# Altium PCB PCB2.PcbDoc
Units mm, origin at the board's own origin, x right, y up, seen from the top; angles counter-clockwise.
Board outline 54.13 x 60.13 mm, 2 copper layers (Top Layer, Bottom Layer); 63 components, 36 nets, 168 pads, 213 vias.
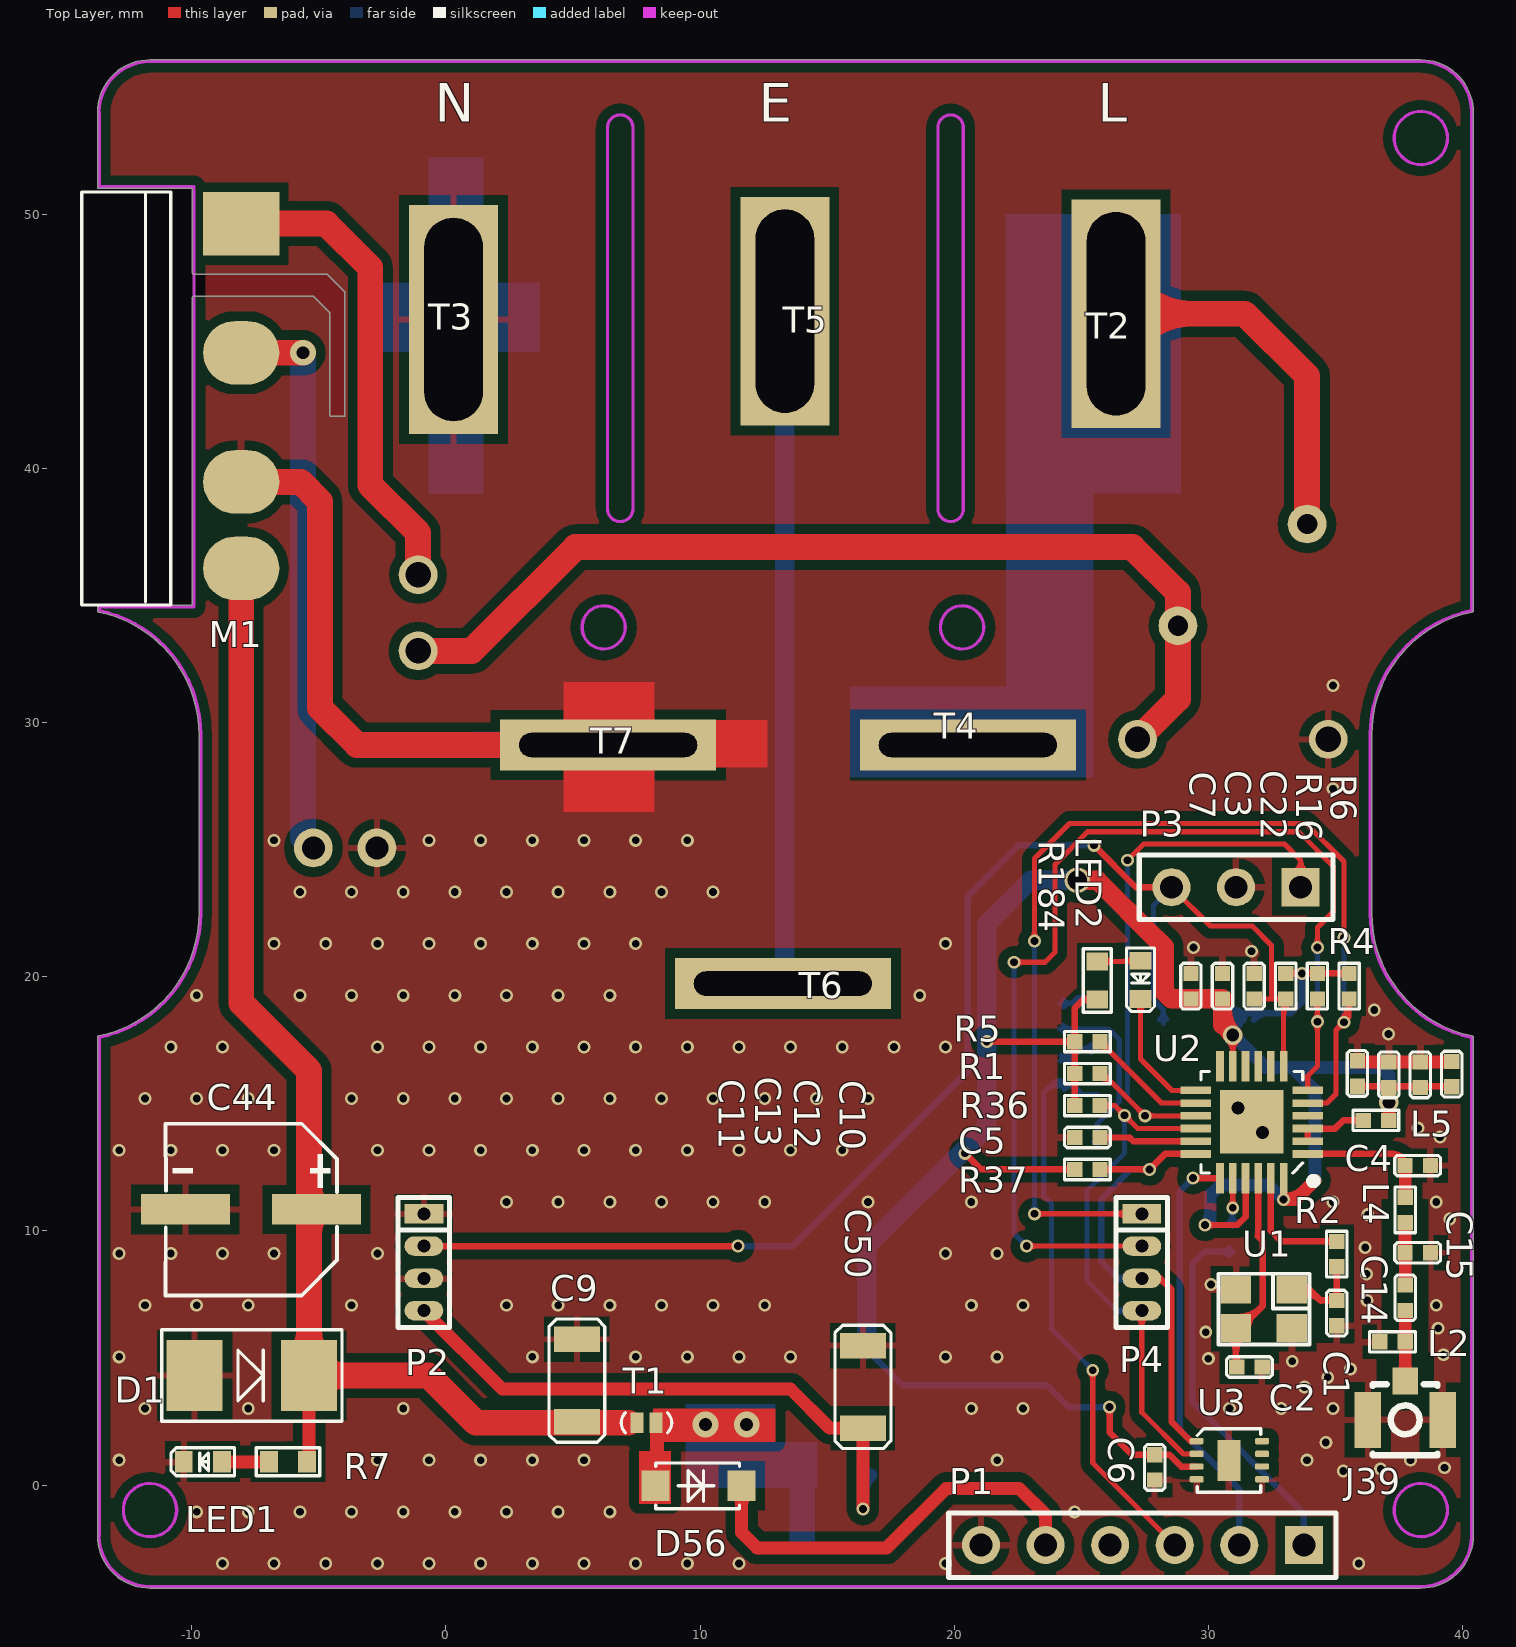
[diagram p0: Top Layer view]
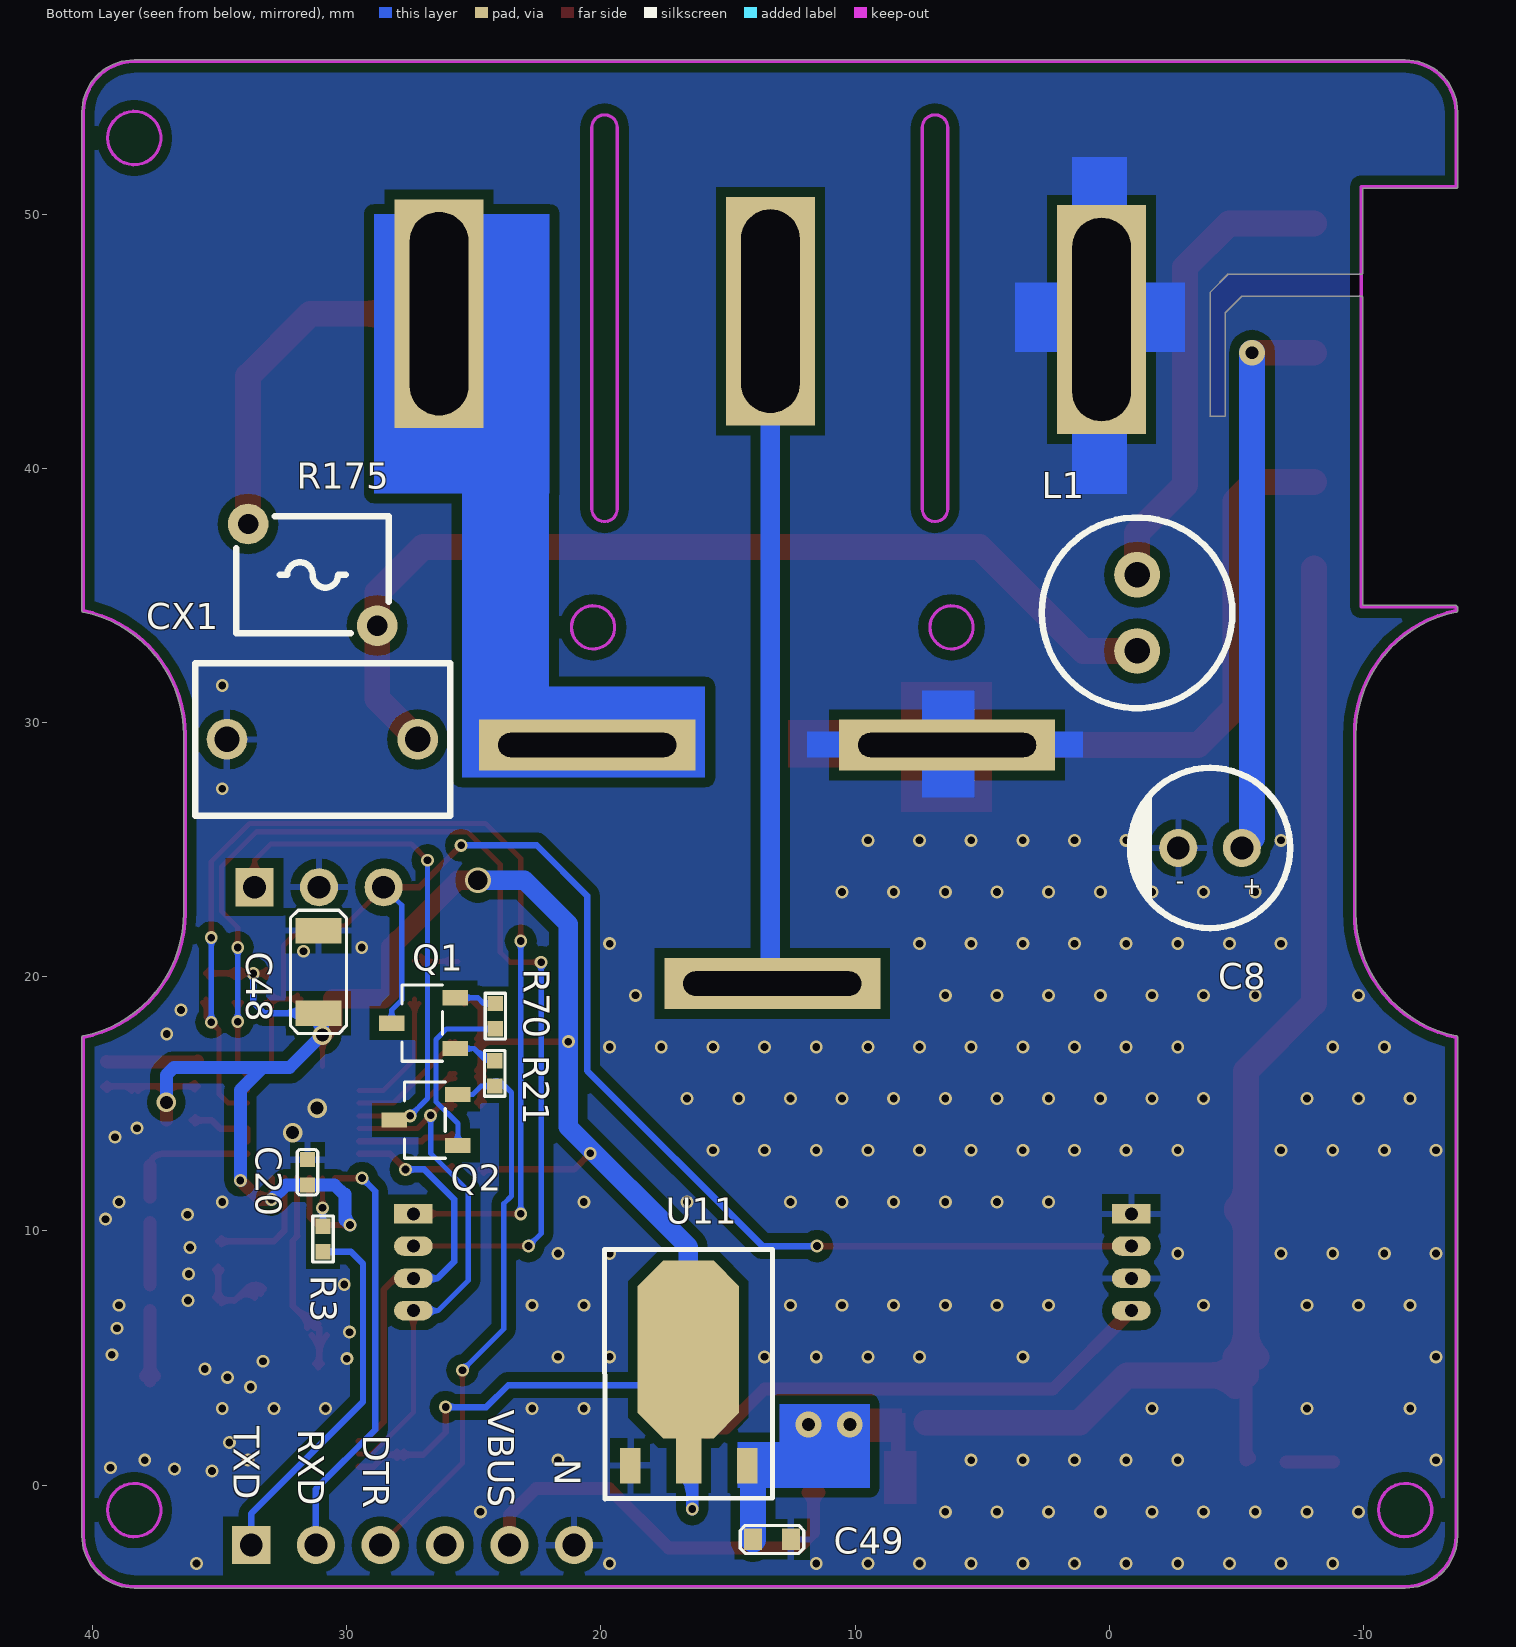
[diagram p1: Bottom Layer view, seen from below]

## Layer stack, top to bottom
Top Layer: signal copper 0.0356
Dielectric: dielectric 0.32, FR-4, Dk 4.8
Bottom Layer: signal copper 0.0356

## Board outline
-13.703,-1.988 -13.703,17.613 cw(c-13.639,17.613) -13.652,17.676 ccw(c-14.639,22.512) -9.703,22.512 -9.703,29.512 ccw(c-14.639,29.512) -13.652,34.348 ccw(c-14.639,29.512) -13.652,34.349 -13.652,34.348 cw(c-13.639,34.411) -13.703,34.411 -13.703,34.527 cw(c-13.639,34.527) -13.667,34.584 cw(c-13.609,34.557) -13.609,34.621 -9.97,34.621 -9.97,46.711 cw(c-9.906,46.711) -9.906,46.774 -5.232,46.774 cw(c-5.232,46.711) -5.187,46.756 -4.578,46.146 cw(c-4.623,46.101) -4.559,46.101 -4.559,42.05 -3.975,42.05 -3.975,46.938 -4.675,47.637 -9.906,47.637 cw(c-9.906,47.701) -9.97,47.701 -9.97,51.016 -13.639,51.016 cw(c-13.639,51.079) -13.703,51.079 -13.703,54.012 cw(c-11.639,54.012) -11.639,56.076 38.361,56.076 cw(c38.361,54.012) 40.424,54.012 40.424,34.411 cw(c40.361,34.411) 40.373,34.348 cw(c41.361,29.512) 40.373,34.349 40.373,34.348 ccw(c41.361,29.512) 36.424,29.512 36.424,22.512 ccw(c41.361,22.512) 40.373,17.676 ccw(c41.361,22.512) 40.373,17.676 cw(c40.361,17.613) 40.424,17.613 40.424,-1.988 cw(c38.361,-1.988) 38.361,-4.052 -11.639,-4.052 cw(c-11.639,-1.988)

## Design rules (kind name [scope] priority, off if disabled: settings)
Clearance RF [InNetClass('rf')] p1: gap=0.635
Clearance AC_L [InNetClass('AC')] p2: gap=5.08
Clearance GND [InPolygon] p3: gap=0.381
Clearance [All] p4: gap=0.127
PolygonConnect [IsVia And InNet(AC_N)] p1: connectstyle=Direct reliefconductorwidth=0.254 reliefentries=4 polygonreliefangle="90 Angle"
PolygonConnect PolygonConnect_1 [All] p2: connectstyle=Relief reliefconductorwidth=0.254 reliefentries=4 polygonreliefangle="90 Angle"
RoutingVias [All] p1: holewidth=0.711 width=1.27 viastyle="Through Hole" minholewidth=0.711 minwidth=1.27 maxholewidth=0.711 maxwidth=1.27
SilkscreenOverComponentPads [IsPad] p1: minsilkscreentomaskgap=0.254
SolderMaskExpansion [All] p1: expansion=0.102
Width [All] p1: maxlimit=7.62 minlimit=0.127 preferedwidth=0.254
27 further rules are at their usual default settings.

## Classes and differential pairs
net class rf: NetC14_1 NetC14_2
component class 01_ESP-CAM: C1 C2 C3 C4 C5 C6 C7 C10 C11 C12 C13 C14 C15 C20 C22 C48 C49 C50 C98 C99 D56 D88 FB5 J39 L2 L4 L5 LED2 M11 P1 P2 P3 P4 P111 P222 Q1 Q2 R1 R2 R3 R4 R5 R6 R16 R21 R36 R37 R70 R184 R707 SW222 U1 U2 U3 U11 U222
component class power: C8 C9 C44 C130 CX1 D1 D10 L1 LED1 M1 P7 R7 R173 R175 R176 R177 T1 T2 T3 T4 T5 T6 T7

## Components (designator, comment, footprint, x,y, rotation, side; value= is the part's Value field where it differs from the comment)
C1 "CAP NP_Dup1" 0402C 35.052,7.27 r270 top
C2 "CAP NP_Dup1" 0402C 31.115,4.648 r0 top
C3 "CAP NP_Dup1" 0402C 30.557,19.131 r90 top
C4 "CAP NP_Dup1" 0402C 38.735,12.573 r180 top
C5 "CAP NP_Dup1" 0402C 25.74,13.678 r180 top
C6 "CAP NP_Dup1" 0402C 27.89,1.199 r270 top
C7 "CAP NP_Dup1" 0402C 29.312,19.131 r90 top
C8 "MHT10UF400V87EC0217" CAP-TH_BD6.3-P2.50-D0.5-FD -3.962,25.07 r0 bottom
C9 "1uF/50V" 1206C 5.156,5.74 r270 top
C10 "CAP NP_Dup1" 0402C 39.573,15.672 r90 top
C11 "CAP NP_Dup1" 0402C 35.865,15.697 r90 top
C12 "CAP NP_Dup1" 0402C 38.337,15.646 r90 top
C13 "CAP NP_Dup1" 0402C 37.101,15.646 r90 top
C14 "CAP NP_Dup1" 0402C 37.744,7.874 r270 top
C15 "CAP NP_Dup1" 0402C 38.735,9.144 r180 top
C20 "CAP NP_Dup1" 0402C 31.547,11.811 r90 bottom
C22 "CAP NP_Dup1" 0402C 31.801,19.131 r90 top
C44 "RX220UF16V90RV0106" CAP-SMD_BD6.3-L6.6-W6.6-FD-2 -7.671,10.846 r180 top
C48 "CAP NP_Dup1" 1206C 31.115,18.567 r90 bottom
C49 "CAP NP" 0603C 14.021,-2.134 r180 bottom
C50 "CAP NP" 1206C 16.409,2.24 r90 top
CX1 "MPX334K31B9KN20600" CAP-TH_L10.0-W6.0-P7.50-D0.6 30.963,29.342 r180 bottom
D1 "SMBJ12CA" SMB -9.881,4.318 r0 top
D56 "LL4148" sod123 8.255,-0.025 r0 top
J39 "IPEX_0" IPEX-SMD_BWIPX-1-001E 37.745,3.333 r270 top
L1 "1.2mH/0.3A" IND-TH_BD7.5-P3.00-D0.6 -1.092,34.321 r90 bottom
L2 "CHOKE" 0402R 37.744,5.639 r180 top
L4 "CHOKE" 0402R 37.744,11.328 r270 top
L5 "CHOKE" 0402R 36.093,14.351 r0 top
LED1 "5V" 0603LED -8.811,0.92 r180 top
LED2 "5V" 0603LED 27.331,20.631 r270 top
M1 "LS03-K3B12SS" LS03-K3B12SS -10.82,49.632 r270 top
P1 "Header 6" HDR1X6 33.757,-2.357 r180 top
P2 "Header 4" 1.27-4P -0.864,10.676 r270 top locked
P3 "Header 3" HDR1X3 33.63,23.526 r180 top
P4 "Header 4" 1.27-4P 27.381,10.676 r270 top locked
Q1 "NPN BCE_2" SOT23-3 25.731,17.176 r180 bottom
Q2 "NPN BCE_2" SOT23-3 25.629,13.366 r180 bottom
R1 "RESISTOR_0" 0402R 25.74,16.192 r180 top
R2 "RESISTOR" 0402R 35.052,8.59 r90 top
R3 "RESISTOR" 0402R 30.937,10.185 r270 bottom
R4 "RESISTOR_0" 0402R 35.535,19.131 r90 top
R5 "RESISTOR_0" 0402R 25.74,17.45 r180 top
R6 "RESISTOR_0" 0402R 34.29,19.131 r90 top
R7 "1K" 0603R -6.957,0.92 r0 top
R16 "RESISTOR_0" 0402R 33.046,20.131 r270 top
R21 "RESISTOR_0" 0402R 24.181,15.702 r90 bottom
R36 "RESISTOR_0" 0402R 25.74,14.935 r180 top
R37 "RESISTOR_0" 0402R 25.74,12.421 r180 top
R70 "RESISTOR_0" 0402R 24.156,18.954 r270 bottom
R175 "FTR250-030" FUSE-TH_L6.0-W4.6-P5.10-D0.6-S4.00 31.344,35.814 r0 bottom
R184 "1K" 0603R 25.629,20.606 r270 top
T1 "TEST_P" TEST_P 7.518,2.456 r0 top
T2 "TP" 220V_HOLE 26.367,46.087 r90 top locked
T3 "TP" 220V_HOLE 0.307,45.859 r90 top locked
T4 "TP" 220V_HOLE2#1 20.541,28.88 r180 top locked
T5 "TP" 220V_HOLE 13.337,46.189 r90 top locked
T6 "TP" 220V_HOLE2#2 13.261,19.735 r180 top locked
T7 "TP" 220V_HOLE2#1 6.384,28.88 r180 top locked
U1 "X1_1" XTAL4TN_3225 32.182,6.939 r180 top
U2 "ESP8684H4" QFN24-MPU6000 33.909,13.03 r180 top
U3 "SHT40" SH30 30.811,0.97 r0 top
U11 "TLV1117" SOT223 18.847,0.767 r180 bottom

## Footprints (in the part's own frame and the unit in brackets; to place one, negate y for a bottom-side part, rotate by r counter-clockwise, add the part's x,y. Pads: shape width x height; smd on the part's side, far side on the other; paste and mask are expansions set on the pad)
1.27-4P [mil]
  rect 30x60 hole 20: 1(0,0)
  oval 30x60 hole 20: 2(50,0) 3(100,0) 4(150,0)
  silkscreen extent -25,-40 176,40
220V_HOLE [mm]
  rect 9x3.5 hole 2.3 slot 8 at 0 deg: 1(0,0)
220V_HOLE2#1 [mm]
  rect 8.5x2 hole 0.95 slot 7 at 0 deg: 1(0,-0.24)
220V_HOLE2#2 [mm]
  rect 8.5x2 hole 0.95 slot 7 at 0 deg: 1(0,0)
0402C [mm]
  rect 0.6x0.6 smd: 1(0,0) 2(1,0)
  silkscreen extent -0.4,-0.4 1.4,0.4
0402R [mm]
  rect 0.6x0.6 smd: 1(0,0) 2(1,0)
  silkscreen extent -0.4,-0.4 1.4,0.4
0603C [mm]
  rect 0.7x0.85 smd: 1(0,0) 2(1.5,0)
  silkscreen extent -0.5,-0.55 2,0.55
0603LED [mm]
  rect 0.7x0.85 smd: 1(0,0) 2(1.5,0)
  silkscreen extent -0.5,-0.55 2,0.55
0603R [mm]
  rect 0.7x0.85 smd: 1(0,0) 2(1.5,0)
  silkscreen extent -0.5,-0.55 2,0.55
1206C [mm]
  rect 1x1.8 smd: 1(0,0) 2(3.25,0)
  silkscreen extent -0.8,-1.1 4.05,1.1
CAP-SMD_BD6.3-L6.6-W6.6-FD-2 [mm]
  rect 3.5x1.2 smd: 1(-2.58,0) 2(2.58,0)
  silkscreen extent -3.4,-3.38 3.36,3.38
CAP-TH_BD6.3-P2.50-D0.5-FD [mil]
  round 59.05 / inner round 60 / far side round 60 hole 35.43 paste-99999 mask+1.97: 1(-49.21,0) 2(49.21,0)
  silkscreen extent -124,-124 127,124
CAP-TH_L10.0-W6.0-P7.50-D0.6 [mil]
  round 62.99 / inner round 60 / far side round 60 hole 39.37: 1(-147.64,0) 2(147.64,0)
  silkscreen extent -197,-118 198,118
FUSE-TH_L6.0-W4.6-P5.10-D0.6-S4.00 [mm]
  round 1.6 / inner round 1.524 / far side round 1.524 hole 0.8: 1(-2.54,2) 2(2.54,-2)
  silkscreen extent -3,-2.3 3,2.3
HDR1X3 [mm] "Connector; Header; 3 Position"
  rect 1.5x1.5 hole 0.9: 1(0,0)
  round 1.5 hole 0.9: 2(2.54,0) 3(5.08,0)
  silkscreen extent -1.27,-1.27 6.35,1.27
HDR1X6 [mm] "Connector; Header; 6 Position"
  rect 1.5x1.5 hole 0.9: 1(0,0)
  round 1.5 hole 0.9: 2(2.54,0) 3(5.08,0) 4(7.62,0) 5(10.16,0) 6(12.7,0)
  silkscreen extent -1.27,-1.27 13.97,1.27
IND-TH_BD7.5-P3.00-D0.6 [mm]
  round 1.8 / inner round 1.524 / far side round 1.524 hole 1: 1(-1.5,0) 2(1.5,0)
  silkscreen extent -3.75,-3.75 3.75,3.75
IPEX-SMD_BWIPX-1-001E [mm]
  rect 1.05x1 smd: 1(-0.763,0)
  rect 2.2x1.05 smd: 2(0.763,-1.475) 3(0.763,1.475)
  silkscreen extent -0.64,-1.27 2.16,1.27
LS03-K3B12SS [mm]
  rect 2.5x3 smd: 1(0,2.769)
  oval 2.5x3 smd: 2(5.08,2.769) 3(10.16,2.769) 4(13.564,2.769)
  silkscreen extent -1.24,-3.5 15,0
QFN24-MPU6000 [mm]
  rect 1.2x0.3 smd: 1(0,0) 2(0,-0.5) 3(0,-1) 4(0,-1.5) 5(0,-2) 6(0,-2.5) 13(4.4,-2.5) 14(4.4,-2) 15(4.4,-1.5) 16(4.4,-1) 17(4.4,-0.5) 18(4.4,0)
  rect 0.3x1.2 smd: 7(0.95,-3.45) 8(1.45,-3.45) 9(1.95,-3.45) 10(2.45,-3.45) 11(2.95,-3.45) 12(3.45,-3.45) 19(3.45,0.95) 20(2.95,0.95) 21(2.45,0.95) 22(1.95,0.95) 23(1.45,0.95) 24(0.95,0.95)
  rect 2.5x2.5 smd: 25(2.21,-1.27)
  silkscreen extent -0.31,-3.25 4.2,1.16
SH30 [mm]
  rrect50% 0.55x0.25 smd: 1(-1.275,0.762) 2(-1.275,0.262) 3(-1.275,-0.238) 4(-1.275,-0.738) 5(1.3,-0.738) 6(1.3,-0.238) 7(1.3,0.262) 8(1.3,0.762)
  rect 0.9x1.6 smd: 9(0,0)
  silkscreen extent -1.25,-1.25 1.25,1.25
SMB [mm]
  rect 2.2x2.8 smd: 1(0,0) 2(4.5,0)
  silkscreen extent -1.3,-1.8 5.8,1.8
sod123 [mm]
  rect 1.1x1.2 smd: 1(0,0) 2(3.385,0)
  silkscreen extent 0,-0.9 3.3,0.9
SOT23-3 [mm]
  rect 1x0.6 smd: 1(0,0) 2(0,2) 3(-2.5,1)
  silkscreen extent -2.1,-0.5 -0.5,2.5
SOT223 [mm]
  rect 0.8x1.4 smd: 1(0,0) 3(4.6,0)
  rect 1x1.854 smd: 2(2.3,0.227)
  oct 4x7 smd: 4(2.286,4.572)
  silkscreen extent -1.02,-1.3 5.59,8.51
TEST_P [mm]
  rect 0.5x0.8 smd: 1(0,0) 2(0.75,0)
  silkscreen extent -0.62,-0.4 1.37,0.4
XTAL4TN_3225 [mm]
  rect 1.2x1.1 smd: 1(-1.1,-0.75) 2(1.1,-0.75) 3(1.1,0.75) 4(-1.1,0.75)
  silkscreen extent -1.8,-1.38 1.79,1.4

## Part data
C8 C44: library part "Cap Pol1", "Polarized Capacitor (Radial)"
C9 CX1: library part Cap, "Capacitor"
D1: library part 1N5819HW-7-F, "1.0 A Surface Mount Schottky Barrier Rectifier, 40 V, -65 to 125 degC, 2-Pin SOD-123 Package, RoHS, Tape and Reel"
D56: "VISHAY,LL4148,圆柱体MiniMELF100V/2A,ROHS"
L1: library part 1276AS-H-100M=P2, "Metal alloy Power Inductor, 10 uH, ±20%, 1210 (3225)"
LED1 LED2: library part LED
P1: "Header, 6-Pin"
P2 P4: "Header, 4-Pin"
P3: "Header, 3-Pin"
R7 R184: library part R, "R"
R175: library part "Res Varistor", "Varistor (Voltage-Sensitive Resistor)"
U11: library part TLV1117-33IDCY

## Via types
v1: diameter 0.508, hole 0.305, Top Layer to Bottom Layer, tented both sides, 205 vias
v2: diameter 0.762, hole 0.508, Top Layer to Bottom Layer, tented both sides, 4 vias
v3: diameter 1.016, hole 0.508, Top Layer to Bottom Layer, tented both sides, 3 vias
v4: diameter 1.016, hole 0.762, Top Layer to Bottom Layer, tented both sides, 1 vias

## Nets (pads, with @x,y where several pads share a name; then routed paths per layer and width w, separated by ;. In a path a pad name is that pad's centre, name@x,y a point inside that pad or via, vN(x,y) a via of type N, cw(c..) or ccw(c..) an arc to the next point about the centre after c; other vN are vias at no path point)
AC_L: L1.2 M1.1 | length 18.7
  Top Layer w1.016: M1.1 -6.477,49.632 -4.699,49.632 -2.972,47.904 -2.972,39.345 -1.092,37.465 L1.2
AC_N: C1.2 C2.2 C3.2 C4.1 C5.2 C6.2 C7.2 C8.2 C9.1 C10.2 C11.2 C12.2 C13.2 C15.1 C20.2 C22.2 C44.2 C48.2 C49.2 C50.2 CX1.1 D1.1 J39.2 J39.3 L2.2 LED1.2 M1.3 P1.6 P2.1 P2.3 P3.2 T3.1 T7.1 U1.2 U1.4 U2.25 U3.4 U3.5 U3.9 U11.1 | length 27.5
  Top Layer w0.508: C11.2@35.865,16.688 35.906,16.646 C13.2 C12.2 39.43,16.646 C10.2@39.446,16.662
  Top Layer w1.016: M1.3 -5.715,39.472 -4.953,38.71 -4.953,33.325 -4.953,30.582 -3.491,29.12 T7.1 T7.1@6.065,29.439
  other v1: -8.788,-3.08 -6.756,-3.08 -4.724,-3.08 -2.692,-3.08 -0.66,-3.08 1.372,-3.08 3.404,-3.08 5.436,-3.08 7.468,-3.08 9.5,-3.08 11.532,-3.08 19.66,-3.08 35.916,-3.08 -9.804,-1.048 -7.772,-1.048 -5.74,-1.048 -3.708,-1.048 -1.676,-1.048 0.356,-1.048 2.388,-1.048 4.42,-1.048 6.452,-1.048 24.74,-1.048 35.306,0.559 36.779,0.635 39.294,0.686 -12.852,0.984 -2.692,0.984 -0.66,0.984 1.372,0.984 3.404,0.984 5.436,0.984 21.692,0.984 33.884,0.984 37.948,0.984 34.62,1.676 -11.836,3.016 -7.772,3.016 -1.676,3.016 20.676,3.016 22.708,3.016 30.836,3.016 32.868,3.016 34.9,3.016 33.782,3.861 34.696,4.242 35.585,4.572 33.299,4.877 29.997,4.978 -12.852,5.048 3.404,5.048 7.468,5.048 9.5,5.048 11.532,5.048 13.564,5.048 19.66,5.048 21.692,5.048 39.243,5.131 29.896,6.02 39.04,6.172 -11.836,7.08 -9.804,7.08 -7.772,7.08 -3.708,7.08 2.388,7.08 4.42,7.08 6.452,7.08 8.484,7.08 10.516,7.08 12.548,7.08 20.676,7.08 22.708,7.08 38.964,7.08 36.246,7.264 30.101,7.894 36.22,8.306 -12.852,9.112 -10.82,9.112 -8.788,9.112 -6.756,9.112 -2.692,9.112 19.66,9.112 21.692,9.112 36.17,9.347 39.497,10.465 36.271,10.643 2.388,11.144 4.42,11.144 6.452,11.144 8.484,11.144 10.516,11.144 12.548,11.144 16.612,11.144 20.676,11.144 34.9,11.144 38.964,11.144 -12.852,13.176 -10.82,13.176 -8.788,13.176 -6.756,13.176 -2.692,13.176 -0.66,13.176 1.372,13.176 3.404,13.176 5.436,13.176 7.468,13.176 9.5,13.176 11.532,13.176 13.564,13.176 15.596,13.176 39.116,13.691 38.252,14.046 -11.836,15.208 -9.804,15.208 -7.772,15.208 -3.708,15.208 -1.676,15.208 0.356,15.208 2.388,15.208 4.42,15.208 6.452,15.208 8.484,15.208 10.516,15.208 12.548,15.208 14.58,15.208 16.612,15.208 -10.82,17.24 -8.788,17.24 -2.692,17.24 -0.66,17.24 1.372,17.24 3.404,17.24 5.436,17.24 7.468,17.24 9.5,17.24 11.532,17.24 13.564,17.24 15.596,17.24 17.628,17.24 19.66,17.24 37.084,17.755 36.525,18.694 -9.804,19.272 -5.74,19.272 -3.708,19.272 -1.676,19.272 0.356,19.272 2.388,19.272 4.42,19.272 6.452,19.272 18.644,19.272 31.699,21.006 29.413,21.158 -6.756,21.304 -4.724,21.304 -2.692,21.304 -0.66,21.304 1.372,21.304 3.404,21.304 5.436,21.304 7.468,21.304 19.66,21.304 -5.74,23.336 -3.708,23.336 -1.676,23.336 0.356,23.336 2.388,23.336 4.42,23.336 6.452,23.336 8.484,23.336 10.516,23.336 -6.756,25.368 -0.66,25.368 1.372,25.368 3.404,25.368 5.436,25.368 7.468,25.368 9.5,25.368 34.9,27.4 34.9,31.464
  other v2: 32.131,13.868 31.166,14.834
DTR: P1.3 Q2.2 R21.1 | length 25.2
  Top Layer w0.203: v1@25.343,4.413 cw(c25.083,4.153) 25.451,4.153 cw(c25.819,4.153) v1@25.559,4.413 ; v1(25.451,4.521) 25.451,1.575 25.451,0.869 27.72,-1.4 P1.3
  Bottom Layer w0.203: 23.598,15.521 cw(c24.071,15.048) R21.1@24.182,15.707 ; 23.876,15.799 cw(c24.151,15.525) R21.1@24.216,15.908 ; R21.1@24.321,15.562 cw(c24.66,15.223) 24.66,15.702 cw(c24.66,16.181) R21.1@24.321,15.843 ; v1@25.298,4.521 ccw(c24.93,4.521) 25.191,4.781 ccw(c25.451,5.042) v1@25.451,4.674 ; v1(25.451,4.521) 23.825,6.147 23.825,11.074 23.52,11.379 23.52,15.443 23.78,15.702 R21.1 24.709,15.702 25.046,15.366 Q2.2
EARTH: T5.1 T6.1 | length 26.5
  Bottom Layer w0.762: T6.1 13.337,19.811 T5.1
EN: C22.1 P2.2 P3.3 Q1.3 R16.2 U2.7 | length 61.2
  Top Layer w0.203: P3.3 30.079,21.996 31.725,21.996 32.487,21.234 32.487,19.131 ; C22.1 32.487,19.131 ; C22.1@31.941,18.991 cw(c32.28,18.652) 32.28,19.131 cw(c32.28,19.61) C22.1@31.941,19.272 ; R16.2@32.905,18.991 ccw(c32.567,18.652) 32.567,19.131 ccw(c32.567,19.61) R16.2@32.905,19.272 ; U2.7 32.959,19.045 R16.2 32.487,19.131 ; 32.959,18.443 cw(c33.734,18.443) R16.2@33.186,18.991
  Top Layer w0.254: P2.2 v1(11.498,9.406) ; v1@11.408,9.316 ccw(c11.191,9.1) 11.191,9.406 ccw(c11.191,9.713) v1@11.408,9.496 ; v1(25.502,25.171) 27.147,23.526 P3.3
  Bottom Layer w0.203: Q1.3@28.09,18.316 ccw(c27.752,18.655) 28.231,18.655 ccw(c28.71,18.655) Q1.3@28.371,18.316 ; Q1.3 28.231,18.694 27.838,19.087 27.838,22.814 P3.3
  Bottom Layer w0.254: v1(11.498,9.406) 13.648,9.406 20.541,16.299 20.541,23.182 22.53,25.171 v1(25.502,25.171) ; v1@11.588,9.316 cw(c11.805,9.1) 11.805,9.406 cw(c11.805,9.713) v1@11.588,9.496
ESP_VDD33: C3.1 C6.1 C7.1 C10.1 C11.1 C12.1 C13.1 C20.1 C48.1 C50.1 L5.2 P2.4 R1.2 R4.2 R5.2 R6.2 R16.1 R36.2 R37.2 R184.2 U2.11 U2.21 U2.24 U3.3 U11.2 U11.4 | length 146
  Top Layer w0.203: v2@30.761,17.506 cw(c30.284,17.029) 30.959,17.029 cw(c31.634,17.029) v2@31.157,17.506 ; U2.11 v2(30.959,17.704)
  Top Layer w0.254: v1@20.422,12.929 cw(c20.422,12.622) 20.638,12.839 cw(c20.855,13.056) v1@20.549,13.056 ; v1(20.422,13.056) 21.057,12.421 R37.2 ; v1(21.285,17.45) R5.2 ; v1@21.375,17.36 cw(c21.592,17.143) 21.592,17.45 cw(c21.592,17.756) v1@21.375,17.54 ; R37.2@24.617,12.298 ccw(c24.322,12.003) 24.322,12.421 ccw(c24.322,12.838) R37.2@24.617,12.543 ; R36.2@24.617,15.058 ccw(c24.322,15.353) 24.74,15.353 ccw(c25.157,15.353) R36.2@24.862,15.058 ; R1.2@24.617,16.07 cw(c24.322,15.775) 24.74,15.775 cw(c25.157,15.775) R1.2@24.862,16.07 ; R1.2@24.617,16.315 ccw(c24.322,16.61) 24.74,16.61 ccw(c25.157,16.61) R1.2@24.862,16.315 ; R36.2 R1.2 R5.2 ; R5.2@24.862,17.327 ccw(c25.157,17.032) 24.74,17.032 ccw(c24.322,17.032) 24.617,17.327 ccw(c24.322,17.032) 24.322,17.45 ccw(c24.322,17.867) 24.617,17.572 ccw(c24.322,17.867) 24.74,17.867 ccw(c25.157,17.867) R5.2@24.862,17.572 ; R184.2@25.383,18.963 ccw(c25.075,18.703) 25.075,19.106 ; R184.2@25.383,19.25 cw(c25.075,19.509) 25.075,19.106 ; R184.2 25.075,19.106 ; v1@26.021,2.984 cw(c25.805,2.767) 26.111,2.767 cw(c26.418,2.767) v1@26.201,2.984 ; v1(26.111,3.073) 26.111,2.083 26.995,1.199 C6.1 28.468,1.199 28.935,0.732 U3.3 ; C6.1@27.767,1.077 ccw(c27.472,0.781) 27.472,1.199 ccw(c27.472,1.617) C6.1@27.767,1.321 ; C6.1@28.012,1.077 cw(c28.307,0.781) 28.307,1.199 cw(c28.307,1.617) C6.1@28.012,1.321 ; v1(29.87,10.236) 31.14,10.236 31.467,10.563 31.467,12.072 U2.21 ; v1@29.96,10.146 cw(c30.177,9.93) 30.177,10.236 cw(c30.177,10.543) v1@29.96,10.326 ; v1@32.869,11.327 ccw(c32.652,11.544) 32.959,11.544 ccw(c33.266,11.544) v1@33.049,11.327 ; v1(32.959,11.237) U2.24 ; R16.1 v1(33.68,20.131) R6.2 R4.2 ; R16.1@33.168,20.009 cw(c33.463,19.714) 33.463,20.131 cw(c33.463,20.549) R16.1@33.168,20.254 ; v1@33.591,20.042 ccw(c33.374,19.825) 33.374,20.131 ccw(c33.374,20.438) v1@33.591,20.221 ; v1@33.77,20.042 cw(c33.987,19.825) 33.987,20.131 cw(c33.987,20.438) v1@33.77,20.221 ; R6.2@34.168,20.009 ccw(c33.873,19.714) 33.873,20.131 ccw(c33.873,20.549) R6.2@34.168,20.254 ; R6.2@34.413,20.009 cw(c34.708,19.714) 34.708,20.131 cw(c34.708,20.549) R6.2@34.413,20.254 ; R4.2@35.413,20.009 ccw(c35.117,19.714) 35.117,20.131 ccw(c35.117,20.549) R4.2@35.413,20.254 ; C11.1 38.337,15.697 39.548,15.697 C10.1 ; C11.1@35.987,15.575 cw(c36.282,15.28) 36.282,15.697 cw(c36.282,16.115) C11.1@35.987,15.82 ; 36.561,15.697 cw(c36.561,15.106) C13.1@36.979,15.524 ; L5.2 L5.2@37.101,14.359 ; C13.1@37.223,15.524 cw(c37.641,15.106) 37.641,15.697 ; 37.797,15.697 cw(c37.797,15.106) C12.1@38.215,15.524 ; C12.1@38.459,15.524 cw(c38.877,15.106) 38.877,15.697 ; 39.094,15.697 cw(c39.094,15.193) C10.1@39.451,15.549 ; 39.217,15.697 ccw(c39.217,16.028) C10.1@39.451,15.794 ; R5.2 24.74,18.771 25.075,19.106
  Top Layer w0.508: P2.4 2.218,3.785 13.564,3.785 15.108,2.24 C50.1 v1(16.409,-0.939) ; C50.1@15.835,2.066 ccw(c15.415,1.647) 15.415,2.24 ccw(c15.415,2.834) C50.1@15.835,2.414 ; C50.1@16.235,2.066 cw(c15.815,1.647) 16.409,1.647 cw(c17.003,1.647) C50.1@16.583,2.066 ; 33.774,11.575 cw(c32.959,12.39) v1(32.959,11.237) 33.437,11.237 v1(34.188,11.989) ; L5.2@37.101,14.359 v2(37.101,15.062)
  Top Layer w0.762: v4(24.841,23.8) 25.629,23.8 27.939,21.489 ; 27.966,21.489 28.27,21.185 28.27,19.406 28.544,19.131 C7.1 C3.1 30.557,18.106 ; 30.557,18.675 ccw(c31.931,18.675) v2(30.959,17.704)
  Bottom Layer w0.254: U11.4 17.963,3.937 23.647,3.937 24.511,3.073 v1(26.111,3.073) ; v1@26.021,2.984 ccw(c25.805,2.767) 25.805,3.073 ccw(c25.805,3.38) v1@26.021,3.163 ; C48.1 33.249,18.567 33.68,18.999 v1(33.68,20.131) ; C48.1@31.779,18.304 cw(c32.415,17.667) 32.415,18.567 cw(c32.415,19.468) C48.1@31.779,18.831 ; v1@33.591,20.042 cw(c33.374,19.825) 33.68,19.825 cw(c33.987,19.825) v1@33.77,20.042
  Bottom Layer w0.508: v1(16.409,-0.939) U11.2@16.409,0.856 ; 16.409,-0.361 cw(c17.475,-0.361) U11.2@16.721,0.393 ; 30.074,10.727 cw(c29.38,10.727) v1(29.87,10.236) 30.074,10.439 30.074,11.455 ; 30.124,11.455 30.48,11.811 C20.1 32.385,11.811 v1(32.959,11.237) ; v2@30.959,17.69 cw(c31.872,17.69) C48.1@31.276,18.381 ; v2(30.959,17.704) 30.959,18.411 C48.1 ; v2@31.115,17.577 32.258,16.434 33.299,16.434 ; v1(34.188,11.989) 34.188,15.545 33.299,16.434 ; v2(37.101,15.062) 37.101,16.137 36.805,16.434 33.299,16.434
  Bottom Layer w0.762: U11.4 16.561,9.373 21.285,14.097 v1(21.285,17.45) 21.285,22.073 23.012,23.8 v4(24.841,23.8)
I2C_SCL: P4.4 R36.1 U2.16 U3.2 | length 25.1
  Top Layer w0.203: R36.1 26.314,14.935 v1(26.701,14.549) 27.219,14.03 U2.16 ; R36.1@25.88,14.795 cw(c26.219,14.456) 26.219,14.935 cw(c26.219,15.414) R36.1@25.88,15.075 ; v1@26.548,14.549 ccw(c26.18,14.549) 26.44,14.809 ccw(c26.701,15.069) v1@26.701,14.701 ; v1@26.701,14.397 cw(c26.701,14.029) 26.961,14.289 cw(c27.221,14.549) v1@26.853,14.549 ; P4.4@27.184,6.669 cw(c26.707,6.192) 27.381,6.192 cw(c28.056,6.192) P4.4@27.579,6.669 ; P4.4 27.381,2.87 29.019,1.232 U3.2
  Bottom Layer w0.203: v1@26.593,14.441 cw(c26.333,14.181) 26.701,14.181 cw(c27.068,14.181) v1@26.808,14.441 ; v1(26.701,14.549) 26.701,13.061 25.222,11.582 25.222,8.052 26.408,6.866 ; P4.4@26.785,6.688 ccw(c26.408,6.378) 26.408,6.866 ; P4.4@26.785,7.044 cw(c26.408,7.354) 26.408,6.866 ; P4.4 26.408,6.866
I2C_SDA: P4.3 R37.1 U2.18 U3.1 | length 22.3
  Top Layer w0.254: R37.1 v1(27.686,12.421) 28.296,13.03 U2.18 ; R37.1@25.862,12.298 cw(c26.157,12.003) 26.157,12.421 cw(c26.157,12.838) R37.1@25.862,12.543 ; P4.3 28.11,8.136 28.55,7.696 28.55,2.494 29.312,1.732 U3.1 ; v1@27.596,12.331 ccw(c27.379,12.114) 27.379,12.421 ccw(c27.379,12.727) v1@27.596,12.51 ; v1@27.686,12.548 ccw(c27.686,12.854) 27.903,12.637 ccw(c28.12,12.421) v1@27.813,12.421 ; P4.3@27.762,8.136 cw(c27.805,7.404) 28.323,7.923 ; U3.1@29.263,1.781 ccw(c29.386,1.904) U3.1@29.386,1.73
  Bottom Layer w0.254: P4.3@26.811,7.967 ccw(c26.433,7.631) 26.433,8.136 ; P4.3@26.811,8.305 cw(c26.433,8.642) 26.433,8.136 ; P4.3 26.433,8.136 ; v1@27.596,12.331 ccw(c27.379,12.114) 27.379,12.421 ccw(c27.379,12.727) v1@27.596,12.51 ; v1(27.686,12.421) 27.623,12.421 26.949,12.421 25.781,11.252 25.781,8.788 26.433,8.136
IO0: P3.1 Q2.3 R1.1 U2.15 | length 26.9
  Top Layer w0.203: R1.1@25.74,15.994 cw(c25.74,15.262) 26.257,15.78 ; R1.1 25.845,16.192 v1(27.507,14.53) U2.15 ; R1.1@25.938,16.192 ccw(c26.164,16.192) R1.1@26.004,16.033 ; v1(26.822,24.587) 27.458,25.223 32.994,25.223 33.63,24.587 ; v1@27.354,14.53 ccw(c26.986,14.53) 27.247,14.79 ccw(c27.507,15.051) v1@27.507,14.683 ; v1@27.615,14.422 cw(c27.875,14.162) 27.875,14.53 cw(c27.875,14.898) v1@27.615,14.638 ; P3.1@33.334,24.103 ccw(c33.086,24.587) 33.63,24.587 ; P3.1 33.63,24.587 ; P3.1@33.926,24.103 cw(c34.174,24.587) 33.63,24.587
  Bottom Layer w0.203: v1(26.822,24.587) 26.822,15.215 v1(27.507,14.53) ; v1@27.354,14.53 ccw(c26.986,14.53) 27.247,14.79 ccw(c27.507,15.051) v1@27.507,14.683
KEY: U2.8
LCD_I2C_SCL: P4.2 R6.1 U2.6 | length 49.3
  Top Layer w0.203: v1(22.352,20.574) 23.571,20.574 23.965,20.968 23.965,24.422 25.249,25.706 33.552,25.706 34.925,24.333 34.925,22.581 34.29,21.946 v1(34.29,21.158) ; v1@22.46,20.466 cw(c22.72,20.206) 22.72,20.574 cw(c22.72,20.942) v1@22.46,20.682 ; v1(22.852,9.406) P4.2 ; v1@22.96,9.298 cw(c23.22,9.038) 23.22,9.406 cw(c23.22,9.774) v1@22.96,9.514 ; U2.6 33.909,16.104 34.29,16.485 v1(34.29,18.237) R6.1 ; R6.1@34.15,18.991 cw(c33.811,18.652) 34.29,18.652 cw(c34.769,18.652) R6.1@34.431,18.991 ; v1@34.183,18.129 cw(c33.922,17.869) 34.29,17.869 cw(c34.658,17.869) v1@34.398,18.129 ; v1@34.183,18.345 ccw(c33.922,18.605) 34.29,18.605 ccw(c34.658,18.605) v1@34.398,18.345 ; v1@34.183,21.266 ccw(c33.922,21.526) 34.29,21.526 ccw(c34.658,21.526) v1@34.398,21.266
  Bottom Layer w0.203: v1@22.244,20.466 cw(c21.984,20.206) 22.352,20.206 cw(c22.72,20.206) v1@22.46,20.466 ; v1(22.352,20.574) 22.352,9.906 v1(22.852,9.406) ; v1@22.699,9.406 ccw(c22.332,9.406) 22.592,9.666 ccw(c22.852,9.926) v1@22.852,9.559 ; v1@34.183,18.345 ccw(c33.922,18.605) 34.29,18.605 ccw(c34.658,18.605) v1@34.398,18.345 ; v1@34.183,21.05 cw(c33.922,20.79) 34.29,20.79 cw(c34.658,20.79) v1@34.398,21.05 ; v1(34.29,18.237) v1(34.29,21.158)
LCD_I2C_SDA: P4.1 R4.1 U2.5 | length 50.8
  Top Layer w0.203: v1@23.049,21.52 ccw(c22.789,21.78) 23.157,21.78 ccw(c23.525,21.78) v1@23.264,21.52 ; v1(23.157,10.676) P4.1 ; v1(23.157,21.412) 23.157,24.655 24.537,26.036 33.832,26.036 35.331,24.536 v1(35.331,21.539) ; v1@23.264,10.568 cw(c23.525,10.308) 23.525,10.676 cw(c23.525,11.044) v1@23.264,10.784 ; P4.1@26.803,10.479 ccw(c26.326,10.002) 26.326,10.676 ccw(c26.326,11.351) P4.1@26.803,10.874 ; U2.5 34.664,15.03 35.027,15.392 35.027,17.907 v1(35.331,18.212) 35.535,18.415 R4.1 ; v1@35.179,18.212 cw(c34.811,18.212) 35.071,17.952 cw(c35.331,17.691) v1@35.331,18.059 ; v1@35.224,18.32 ccw(c34.472,19.071) R4.1@35.535,19.071 ; v1@35.224,21.647 ccw(c34.963,21.907) 35.331,21.907 ccw(c35.699,21.907) v1@35.439,21.647 ; v1@35.367,18.176 ccw(c34.963,18.581) 35.535,18.581 ; R4.1@35.395,18.991 cw(c35.056,18.652) 35.535,18.652 cw(c36.014,18.652) R4.1@35.675,18.991
  Bottom Layer w0.203: v1@23.049,10.784 ccw(c22.789,11.044) 23.157,11.044 ccw(c23.525,11.044) v1@23.264,10.784 ; v1@23.049,21.304 cw(c22.789,21.044) 23.157,21.044 cw(c23.525,21.044) v1@23.264,21.304 ; v1(23.157,10.676) v1(23.157,21.412) ; v1@35.224,18.32 ccw(c34.963,18.58) 35.331,18.58 ccw(c35.699,18.58) v1@35.439,18.32 ; v1@35.224,21.431 cw(c34.963,21.171) 35.331,21.171 cw(c35.699,21.171) v1@35.439,21.431 ; v1(35.331,18.212) v1(35.331,21.539)
NetC1_1: C1.1 R2.1 U1.1 | length 10.2
  Top Layer w0.254: U1.1@33.275,7.752 cw(c33.602,7.393) 33.945,7.736 ; U1.1 33.992,7.689 ; U1.1@33.31,7.771 cw(c33.533,6.964) 34.125,7.556 ; U1.1@33.377,7.527 cw(c33.666,6.481) 34.433,7.248 ; U1.1@33.446,7.564 cw(c33.781,7.196) 34.133,7.548 ; U1.1@33.617,7.376 cw(c33.96,6.998) 34.322,7.36 ; U1.1@33.717,7.513 cw(c33.992,7.386) 33.992,7.689 ; U1.1@33.717,7.866 ccw(c33.992,7.992) 33.992,7.689 ; C1.1@34.93,7.147 ccw(c34.635,6.852) 34.635,7.27 ccw(c34.635,7.687) 34.93,7.392 ccw(c34.635,7.687) 35.052,7.687 ccw(c35.47,7.687) C1.1@35.175,7.392 ; R2.1@34.93,8.468 cw(c34.635,8.173) 35.052,8.173 cw(c35.47,8.173) R2.1@35.175,8.468 ; R2.1 C1.1 34.412,7.27 33.992,7.689
NetC2_1: C2.1 U1.3 U2.22 | length 12.5
  Top Layer w0.254: U1.3@30.783,5.89 cw(c30.061,5.168) 31.082,5.168 cw(c32.103,5.168) U1.3@31.381,5.89 ; C2.1@30.993,4.771 ccw(c30.777,4.987) 31.082,4.987 ; 31.082,5.145 ccw(c31.612,5.145) C2.1@31.237,4.771 ; C2.1 31.082,4.681 U1.3 31.271,6.189 32.131,7.049 32.131,9.619 31.951,9.799 31.959,9.807 U2.22 ; U1.3@31.132,6.358 ccw(c31.132,7.102) U1.3@31.658,6.576 ; U1.3@31.132,6.612 ccw(c31.132,7.969) 32.091,7.01 ; U1.3@31.555,6.189 cw(c32.241,6.189) 31.756,6.675
NetC4_2: C4.2 L4.1 U2.1 | length 5.3
  Top Layer w0.254: U2.1 37.278,13.03 cw(c37.278,12.573) C4.2
  Top Layer w0.508: C4.2 37.744,12.564 L4.1
NetC5_1: C5.1 U2.17 | length 4.5
  Top Layer w0.254: C5.1 26.899,13.678 27.046,13.53 U2.17 ; C5.1@25.862,13.556 cw(c26.157,13.26) 26.157,13.678 cw(c26.157,14.096) C5.1@25.862,13.8
NetC8_1: C8.1 M1.2 | length 22.1
  Top Layer w1.016: M1.2 v3(-5.613,44.552)
  Bottom Layer w1.016: v3(-5.613,44.552) -5.613,25.471 C8.1
NetC9_2: C9.2 C44.1 D1.2 M1.4 R7.2 T1.1 | length 56.3
  Top Layer w0.508: R7.2@-5.525,1.063 ccw(c-5.872,1.41) -5.381,1.41 ; R7.2@-5.381,0.996 D1.2
  Top Layer w1.016: M1.4 -8.052,18.974 -5.381,16.303 D1.2 -0.686,4.318 1.176,2.456 7.188,2.456 ; D1.2@-5.799,5.037 ccw(c-6.81,6.047) -5.381,6.047 ccw(c-3.951,6.047) D1.2@-4.962,5.037 ; -5.381,9.925 cw(c-4.17,9.925) C44.1@-5.026,10.781 ; -5.381,11.767 ccw(c-4.17,11.767) C44.1@-5.026,10.911 ; D1.2@-4.962,3.899 cw(c-3.951,2.889) -3.951,4.318 cw(c-3.951,5.747) D1.2@-4.962,4.737
NetC14_1: C14.1 C15.2 L4.2 | length 2.5
  Top Layer w0.508: C14.1 37.744,9.135 C15.2 37.735,10.319 L4.2
NetC14_2: C14.2 J39.1 L2.1 | length 3.7
  Top Layer w0.508: J39.1@37.571,4.294 ccw(c37.151,4.714) 37.745,4.714 ccw(c38.339,4.714) J39.1@37.919,4.294 ; J39.1 C14.2
NetCX1_2: CX1.2 L1.1 R175.1 | length 38.8
  Top Layer w1.016: L1.1 1.02,32.821 5.105,36.906 23.419,36.906 27.013,36.906 28.804,35.116 R175.1 28.804,30.933 CX1.2 CX1.2@27.178,29.377
NetL5_1: L5.1 U2.2 U2.3 | length 3.5
  Top Layer w0.254: U2.2 U2.3 34.985,14.03 35.306,14.351 L5.1 ; L5.1@35.971,14.229 ccw(c35.676,13.933) 35.676,14.351 ccw(c35.676,14.769) L5.1@35.971,14.473
NetLED1_1: LED1.1 R7.1 | length 1.9
  Top Layer w0.508: LED1.1 R7.1
NetLED2_1: LED2.1 R184.1 | length 3.6
  Top Layer w0.203: R184.1 27.305,20.606 LED2.1 ; R184.1@25.88,20.43 cw(c26.304,20.006) 26.304,20.606 cw(c26.304,21.206) R184.1@25.88,20.782 ; 26.595,20.606 ccw(c26.595,21.292) LED2.1@27.08,20.807 ; 26.717,20.606 cw(c26.717,20.093) LED2.1@27.08,20.456
NetLED2_2: LED2.2 U2.13 | length 6
  Top Layer w0.203: LED2.2@27.155,18.956 cw(c26.731,18.532) 27.331,18.532 cw(c27.93,18.532) LED2.2@27.506,18.956 ; LED2.2 27.331,16.764 28.564,15.53 U2.13
NetQ1_1: Q1.1 R21.2 | length 3.9
  Bottom Layer w0.203: R21.2@24.181,16.698 ccw(c24.254,17.327) 24.702,16.879 ; R21.2 24.526,16.702 24.999,17.176 ; R21.2@24.204,16.899 ccw(c24.316,17.858) 24.999,17.176 ; Q1.1@25.39,17.035 ccw(c25.052,16.697) 25.052,17.176 ccw(c25.052,17.655) Q1.1@25.39,17.316 ; Q1.1 24.999,17.176
NetQ2_1: Q2.1 R70.2 | length 8.5
  Bottom Layer w0.203: R70.2 26.076,17.954 26.492,17.537 26.492,15.088 25.629,14.224 Q2.1 ; R70.2@24.296,17.813 cw(c24.635,17.475) 24.635,17.954 cw(c24.635,18.433) R70.2@24.296,18.094 ; Q2.1@25.489,13.506 ccw(c25.15,13.845) 25.629,13.845 ccw(c26.108,13.845) Q2.1@25.769,13.506
NetR2_2: R2.2 U2.23 | length 5.5
  Top Layer w0.254: U2.23 32.451,12.072 32.451,10.018 32.878,9.59 R2.2 ; R2.2@34.93,9.468 ccw(c34.635,9.173) 34.635,9.59 ccw(c34.635,10.008) R2.2@34.93,9.713
NetR3_1: R3.1 U2.20 | length 3.8
  Top Layer w0.203: v1@30.851,11.02 ccw(c30.591,11.28) 30.959,11.28 ccw(c31.327,11.28) v1@31.067,11.02 ; v1(30.959,10.912) U2.20
  Bottom Layer w0.203: R3.1@30.797,10.326 ccw(c30.458,10.664) 30.937,10.664 ccw(c31.416,10.664) R3.1@31.077,10.326 ; v1@30.851,10.804 cw(c30.644,10.597) 30.937,10.597 ; R3.1 30.937,10.89 v1(30.959,10.912) ; 30.937,10.491 cw(c31.38,10.491) v1@31.067,10.804
NetR5_1: R5.1 U2.14 | length 5.5
  Top Layer w0.203: R5.1@25.74,17.251 cw(c25.74,16.772) 26.078,17.111 cw(c26.417,17.45) R5.1@25.938,17.45 ; R5.1 28.159,15.03 U2.14
NetR175_2: R175.2 T2.1 T4.1 | length 19.1
  Top Layer w1.016: T2.1 31.434,46.087 33.884,43.637 R175.2 ; T2.1@27.245,45.209 cw(c29.365,43.089) 29.365,46.087 cw(c29.365,49.086) T2.1@27.245,46.965
RTS: Q1.2 R70.1 | length 3.1
  Bottom Layer w0.203: R70.1 24.618,18.954 ; R70.1@24.3,18.817 cw(c24.618,18.515) 24.618,18.954 ; R70.1@24.3,19.09 ccw(c24.618,19.392) 24.618,18.954 ; Q1.2@25.39,19.035 ccw(c25.052,18.697) 25.052,19.176 ccw(c25.052,19.655) Q1.2@25.39,19.316 ; Q1.2 24.84,19.176 24.618,18.954
RXD0: P1.2 U2.19 | length 17.6
  Top Layer w0.254: v1(29.398,12.08) U2.19 ; v1@29.488,11.99 cw(c29.705,11.774) 29.705,12.08 cw(c29.705,12.387) v1@29.488,12.17
  Bottom Layer w0.254: v1@29.271,12.08 cw(c28.964,12.08) 29.181,11.863 cw(c29.398,11.647) v1@29.398,11.953 ; v1(29.398,12.08) 28.88,11.562 28.88,2.184 31.217,-0.153 P1.2
TXD0: P1.1 R3.2 | length 15.3
  Bottom Layer w0.254: R3.2@30.815,9.063 ccw(c30.52,8.768) 30.52,9.185 ccw(c30.52,9.603) R3.2@30.815,9.308 ; R3.2 29.836,9.185 29.362,8.712 29.362,3.277 33.757,-1.118 P1.1
VBUS: D56.2 P1.5 | length 17.8
  Top Layer w0.508: D56.2@11.431,-0.285 cw(c10.925,-0.79) 11.64,-0.79 cw(c12.355,-0.79) D56.2@11.849,-0.285 ; D56.2 11.64,-1.861 12.243,-2.464 17.348,-2.464 19.685,-0.127 22.555,-0.127 23.597,-1.169 P1.5
VCC_12V: C49.1 D56.1 T1.2 U11.3 | length 2.8
  Bottom Layer w1.016: C49.1 U11.3@14.021,0.711
  other v3: 10.211,2.388 11.836,2.388
pads on no net: P1.4 U2.4 U2.9 U2.10 U2.12 U3.6 U3.7 U3.8

## Polygon pours and split planes (outlines as drawn)
AC_N on Top Layer "L1_TOP-No Net" (solid, remove dead copper, pour order 0): -17.577,58.826 -17.221,58.471 45.034,58.471 45.034,-5.537 42.316,-8.255 40.894,-6.833 -12.014,-6.833 -12.014,-6.02 -22.301,4.267 -17.221,9.347 -17.221,58.344
AC_N on Bottom Layer "L1_TOP-No Net" (solid, remove dead copper, pour order 1): -17.577,58.826 -17.221,58.471 45.034,58.471 45.034,-5.537 42.316,-8.255 40.894,-6.833 -12.014,-6.833 -12.014,-6.02 -22.301,4.267 -17.221,9.347 -17.221,58.344

## Keep-outs
Keep-Out Layer:
  circle w0.127: c38.36,-0.98 r1.05
  circle w0.127: c-11.64,-0.98 r1.05
  circle w0.127: c38.36,53 r1.05
  circle w0.127: c6.21,33.75 r0.85
  circle w0.127: c20.31,33.75 r0.85
  lines w0.127: -13.64,34.527 -13.64,34.411 ; -13.61,34.557 -9.906,34.557 -9.906,51.079 -13.64,51.079 -13.64,54.012 ; -13.64,-1.988 ccw(c-11.64,-1.988) -11.64,-3.988 ; -13.64,-1.988 ccw(c-11.64,-1.988) -11.64,-3.988 ; -13.64,-1.988 -13.64,17.613 ; -13.64,-1.988 -13.64,17.613 ; -13.64,17.613 ccw(c-14.64,22.512) -9.64,22.512 ; -13.64,17.613 ccw(c-14.64,22.512) -9.64,22.512 ; -13.64,34.411 cw(c-14.64,29.512) -9.64,29.512 ; -13.64,34.411 cw(c-14.64,29.512) -9.64,29.512 ; -13.64,54.012 cw(c-11.64,54.012) -11.64,56.012 ; -13.64,54.012 cw(c-11.64,54.012) -11.64,56.012 ; -11.64,-3.988 38.36,-3.988 ; -11.64,-3.988 38.36,-3.988 ; -11.64,56.012 38.36,56.012 ; -11.64,56.012 38.36,56.012 ; -9.64,22.512 -9.64,29.512 ; -9.64,22.512 -9.64,29.512 ; 6.36,38.412 ccw(c6.86,38.412) 7.36,38.412 ; 6.36,38.412 ccw(c6.86,38.412) 7.36,38.412 ; 6.36,38.412 6.36,53.412 ; 6.36,38.412 6.36,53.412 ; 6.36,53.412 cw(c6.86,53.412) 7.36,53.412 ; 6.36,53.412 cw(c6.86,53.412) 7.36,53.412 ; 7.36,38.412 7.36,53.412 ; 7.36,38.412 7.36,53.412 ; 19.36,38.412 ccw(c19.86,38.412) 20.36,38.412 ; 19.36,38.412 ccw(c19.86,38.412) 20.36,38.412 ; 19.36,38.412 19.36,53.412 ; 19.36,38.412 19.36,53.412 ; 19.36,53.412 cw(c19.86,53.412) 20.36,53.412 ; 19.36,53.412 cw(c19.86,53.412) 20.36,53.412 ; 20.36,38.412 20.36,53.412 ; 20.36,38.412 20.36,53.412 ; 36.36,22.512 ccw(c41.36,22.512) 40.36,17.613 ; 36.36,22.512 ccw(c41.36,22.512) 40.36,17.613 ; 36.36,22.512 36.36,29.512 ; 36.36,22.512 36.36,29.512 ; 36.36,29.512 cw(c41.36,29.512) 40.36,34.411 ; 36.36,29.512 cw(c41.36,29.512) 40.36,34.411 ; 38.36,-3.988 ccw(c38.36,-1.988) 40.36,-1.988 ; 38.36,-3.988 ccw(c38.36,-1.988) 40.36,-1.988 ; 38.36,56.012 cw(c38.36,54.012) 40.36,54.012 ; 38.36,56.012 cw(c38.36,54.012) 40.36,54.012 ; 40.36,-1.988 40.36,17.613 ; 40.36,-1.988 40.36,17.613 ; 40.36,34.411 40.36,54.012 ; 40.36,34.411 40.36,54.012

## Other copper
Top Layer:
  rectangle net AC_N: 7.772,28.245 12.649,30.099
  rectangle net AC_N: 4.623,26.492 8.204,31.598
  rectangle net VCC_12V: 8.153,1.702 12.979,3.023
  rectangle net VCC_12V: 7.595,-0.737 8.865,1.346
  rectangle net VCC_12V: 8.026,1.118 8.585,2.845
Bottom Layer:
  rectangle net AC_N: -0.686,38.989 1.473,52.248
  rectangle net AC_N: -2.972,44.577 3.708,47.32
  rectangle net AC_N: 1.041,28.626 11.887,29.642
  rectangle net AC_N: 5.309,27.051 7.366,31.267
  rectangle net VCC_12V: 9.423,-0.102 14.63,1.702
  rectangle net VCC_12V: 9.423,1.702 12.979,3.2
  rectangle net NetR175_2: 15.9,27.838 24.968,31.42
  rectangle net NetR175_2: 22.047,27.838 25.476,40.03
  rectangle net NetR175_2: 22.022,39.014 28.931,50.013

## Silkscreen, mask and mechanical layers (free items; w line width, h text height)
Top Overlay:
  text "N" at -0.432,53.645 h1.52
  text "E" at 12.319,53.645 h1.52
  text "L" at 25.654,53.645 h1.52
Bottom Overlay:
  text "VBUS" at 24.435,2.972 h1.02 r90
  text "TXD" at 34.442,2.311 h1.02 r90
  text "RXD" at 31.902,2.21 h1.02 r90
  text "DTR" at 29.362,1.981 h1.02 r90
  text "N" at 20.803,-0.025 h1.02 r270
Bottom Solder:
  rectangle: 1.245,30.556 8.052,32.334
  rectangle: 1.245,30.734 3.962,40.767
  rectangle: 21.971,32.029 25.4,41.072
Mechanical 1:
  circle w0.127: c38.361,53 r1.05
  circle w0.127: c-11.639,53 r1.05
  circle w0.127: c20.311,33.75 r0.85
  circle w0.127: c6.211,33.75 r0.85
  circle w0.127: c-11.639,-0.98 r1.05
  circle w0.127: c38.361,-0.98 r1.05
  circle w0.127: c-11.639,53 r1.05
  lines w0.127: 26.775,-3.988 38.361,-3.988 ; 27.965,-3.988 -11.639,-3.988 ; -13.639,-1.988 ccw(c-11.639,-1.988) -11.639,-3.988 ; -13.639,-1.988 ccw(c-11.639,-1.988) -11.639,-3.988 ; -13.639,-1.988 -13.639,17.613 ; -13.639,17.613 ccw(c-14.639,22.512) -9.639,22.512 ; -13.639,17.613 ccw(c-14.639,22.512) -9.639,22.512 ; -9.639,22.512 -9.639,29.512 ; -9.639,22.512 -9.639,29.512 ; -9.639,29.512 ccw(c-14.639,29.512) -13.345,34.342 -13.345,34.471 -13.26,34.557 -9.906,34.557 -9.906,46.711 -6.172,46.711 -5.232,46.711 -4.623,46.101 -4.623,41.986 -3.912,41.986 -3.912,46.965 -4.648,47.701 -9.906,47.701 -9.906,51.079 -13.639,51.079 -13.639,53.5 cw(c-11.639,53.5) -11.639,55.5 38.361,55.5 cw(c38.361,53.5) 40.361,53.5 40.361,34.411 ; 6.361,38.412 ccw(c6.861,38.412) 7.361,38.412 ; 6.361,38.412 ccw(c6.861,38.412) 7.361,38.412 ; 6.361,38.412 6.361,53.412 ; 6.361,38.412 6.361,53.412 ; 6.361,53.412 cw(c6.861,53.412) 7.361,53.412 ; 6.361,53.412 cw(c6.861,53.412) 7.361,53.412 ; 7.361,38.412 7.361,53.412 ; 7.361,38.412 7.361,53.412 ; 19.361,38.412 ccw(c19.861,38.412) 20.361,38.412 ; 19.361,38.412 ccw(c19.861,38.412) 20.361,38.412 ; 19.361,38.412 19.361,53.412 ; 19.361,38.412 19.361,53.412 ; 19.361,53.412 cw(c19.861,53.412) 20.361,53.412 ; 19.361,53.412 cw(c19.861,53.412) 20.361,53.412 ; 20.361,38.412 20.361,53.412 ; 20.361,38.412 20.361,53.412 ; 36.361,22.512 ccw(c41.361,22.512) 40.361,17.613 ; 36.361,22.512 ccw(c41.361,22.512) 40.361,17.613 ; 36.361,22.512 36.361,29.512 ; 36.361,22.512 36.361,29.512 ; 36.361,29.512 cw(c41.361,29.512) 40.361,34.411 ; 36.361,29.512 cw(c41.361,29.512) 40.361,34.411 ; 38.361,-3.988 ccw(c38.361,-1.988) 40.361,-1.988 ; 38.361,-3.988 ccw(c38.361,-1.988) 40.361,-1.988 ; 40.361,-1.988 40.361,17.613 ; 40.361,-1.988 40.361,17.613 ; -3.327,34.849 -3.327,39.37 -2.362,39.37 -2.362,35.077 -1.981,34.696 0.178,34.696 0.178,38.557 0.991,38.557 0.991,34.366 0.813,34.188 -2.667,34.188 -3.327,34.849 ; 15.494,26.721 15.494,27.356 27.686,27.356 30.556,30.226 30.556,31.496 31.064,31.496 31.064,29.997 27.788,26.721 15.494,26.721
Mechanical 15:
  lines w0.127: -6.35,8.756 48.133,8.756 ; 13.373,-1.665 13.373,18.782 ; 0,0 0,17.512 ; 0,0 26.746,0 ; 0,0 0,17.512 ; 0,0 26.746,0 ; 0,17.512 26.746,17.512 ; 0,17.512 26.746,17.512 ; 26.746,0 26.746,17.512 ; 26.746,0 26.746,17.512 ; -13.639,15.931 2.216,15.931 -13.639,15.931 ; 2.32,17.512 2.32,56.012 2.32,17.512 ; 11.887,-3.988 11.887,0.012 11.887,-3.988 ; 24.506,16.769 40.361,16.769 24.506,16.769
Mechanical 30:
  circle w0.064: c40.361,54.012 r0.032
  circle w0.064: c9.861,28.732 r0.032
  circle w0.064: c16.861,28.732 r0.032
  circle w0.064: c2.781,19.335 r0.032
  circle w0.064: c2.781,20.135 r0.032
  circle w0.064: c19.861,53.412 r0.032
  circle w0.064: c19.361,53.412 r0.032
  circle w0.064: c20.361,53.412 r0.032
  circle w0.064: c-11.639,-1.988 r0.032
  circle w0.064: c-11.639,-1.988 r0.032
  circle w0.064: c-42.546,149.417 r0.032
  circle w0.064: c-30.728,149.417 r0.032
  circle w0.064: c-30.728,93.417 r0.032
  circle w0.064: c-30.728,81.334 r0.032
  circle w0.064: c-30.728,93.417 r0.032
  circle w0.064: c19.272,93.522 r0.032
  circle w0.064: c1.272,155.516 r0.032
  circle w0.064: c1.272,148.817 r0.032
  circle w0.064: c0.272,148.817 r0.032
  circle w0.064: c13.257,148.817 r0.032
  circle w0.064: c0.772,148.817 r0.032
  circle w0.064: c0.772,133.817 r0.032
  circle w0.064: c-21.954,115.54 r0.032
  circle w0.064: c-16.308,115.54 r0.032
  circle w0.064: c-16.308,114.74 r0.032
  circle w0.064: c-2.228,120.666 r0.032
  circle w0.064: c-2.228,124.137 r0.032
  circle w0.064: c-9.228,124.137 r0.032
  circle w0.064: c-17.228,136.167 r0.032
  circle w0.064: c-17.126,135.677 r0.032
  circle w0.064: c-17.228,141.905 r0.032
  circle w0.064: c-17.228,136.167 r0.032
  circle w0.064: c-20.228,136.167 r0.032
  circle w0.064: c-23.08,135.667 r0.032
  circle w0.064: c-20.228,135.667 r0.032
  circle w0.064: c-20.228,136.667 r0.032
  circle w0.064: c76.608,159.085 r0.032
  circle w0.064: c76.608,151.417 r0.032
  circle w0.064: c75.008,151.417 r0.032
  circle w0.064: c60.983,91.417 r0.032
  circle w0.064: c75.007,91.417 r0.032
  circle w0.064: c75.008,151.417 r0.032
  circle w0.064: c21.272,160.401 r0.032
  circle w0.064: c21.272,149.417 r0.032
  circle w0.064: c-32.728,149.417 r0.032
  circle w0.064: c18.329,92.955 r0.032
  circle w0.064: c20.215,93.879 r0.032
  circle w0.064: c19.272,93.417 r0.032
  circle w0.064: c20.809,92.137 r0.032

## Dimensions
26.746,0 to 11.887,-3.988 on Mechanical 15
0,17.512 to -13.639,15.931 on Mechanical 15
26.746,17.512 to 40.361,16.769 on Mechanical 15
26.746,0 to 11.887,-3.988 on Mechanical 15
0,17.512 to -13.639,15.931 on Mechanical 15
26.746,17.512 to 40.361,16.769 on Mechanical 15

## Text inside footprints (layer, text, board x,y; h text height)
C8: Bottom Overlay "+" at -5.994,23.834 h0.65 r180; Bottom Overlay "-" at -2.946,23.961 h0.65 r180